# EAGLE board Thetis_RevF4_PCB (EAGLE 9.7.0)
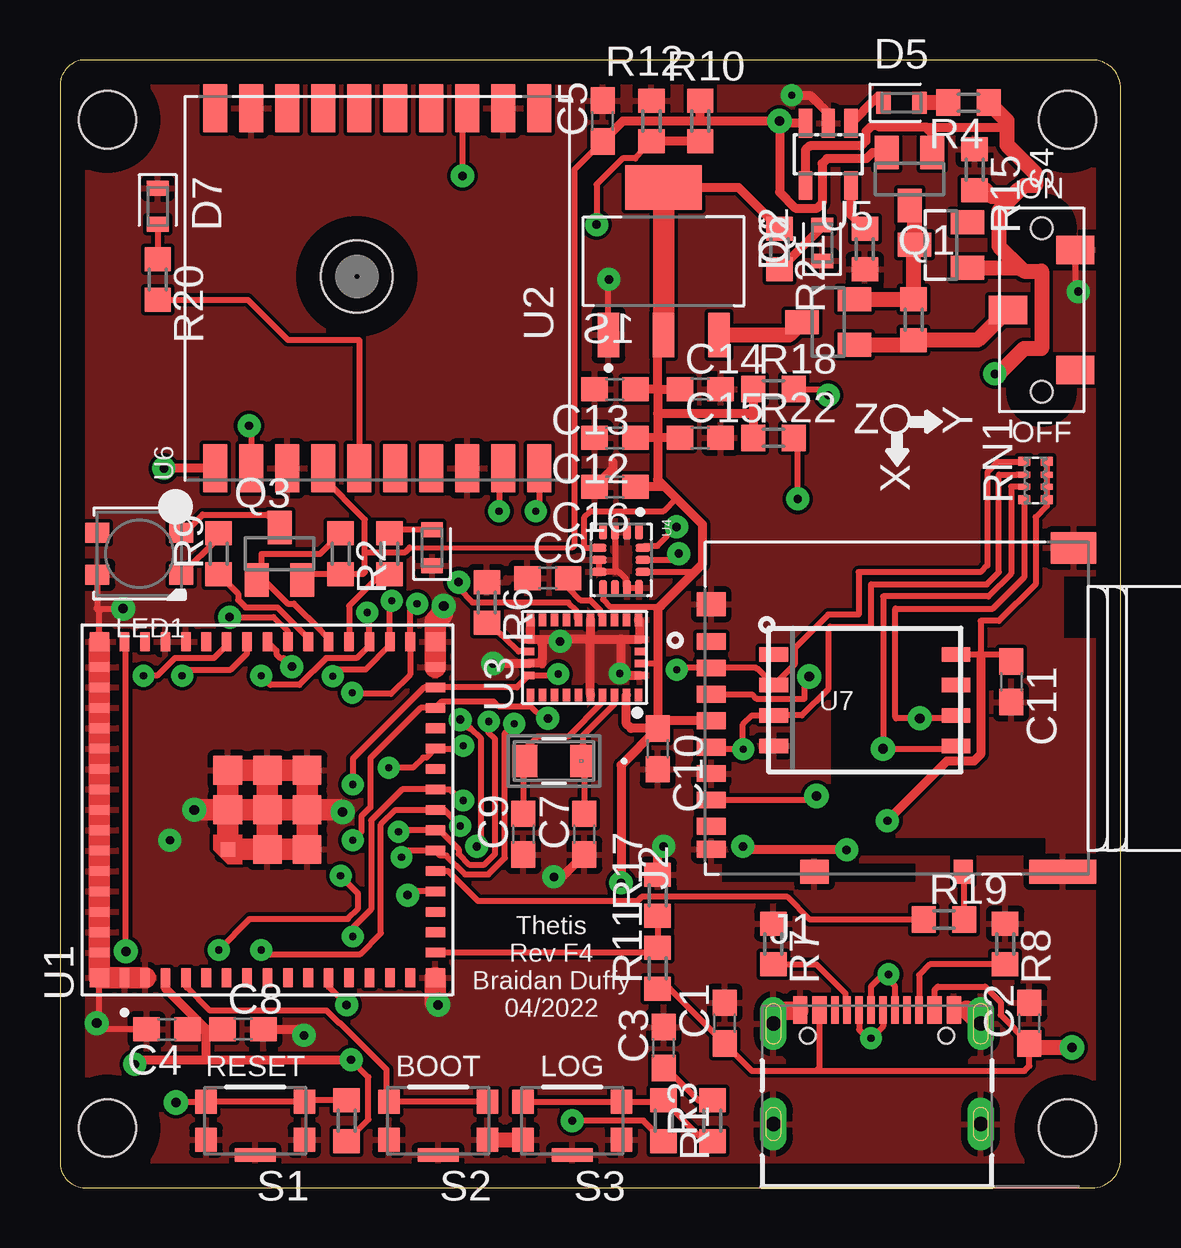
[diagram p0: board, top side]
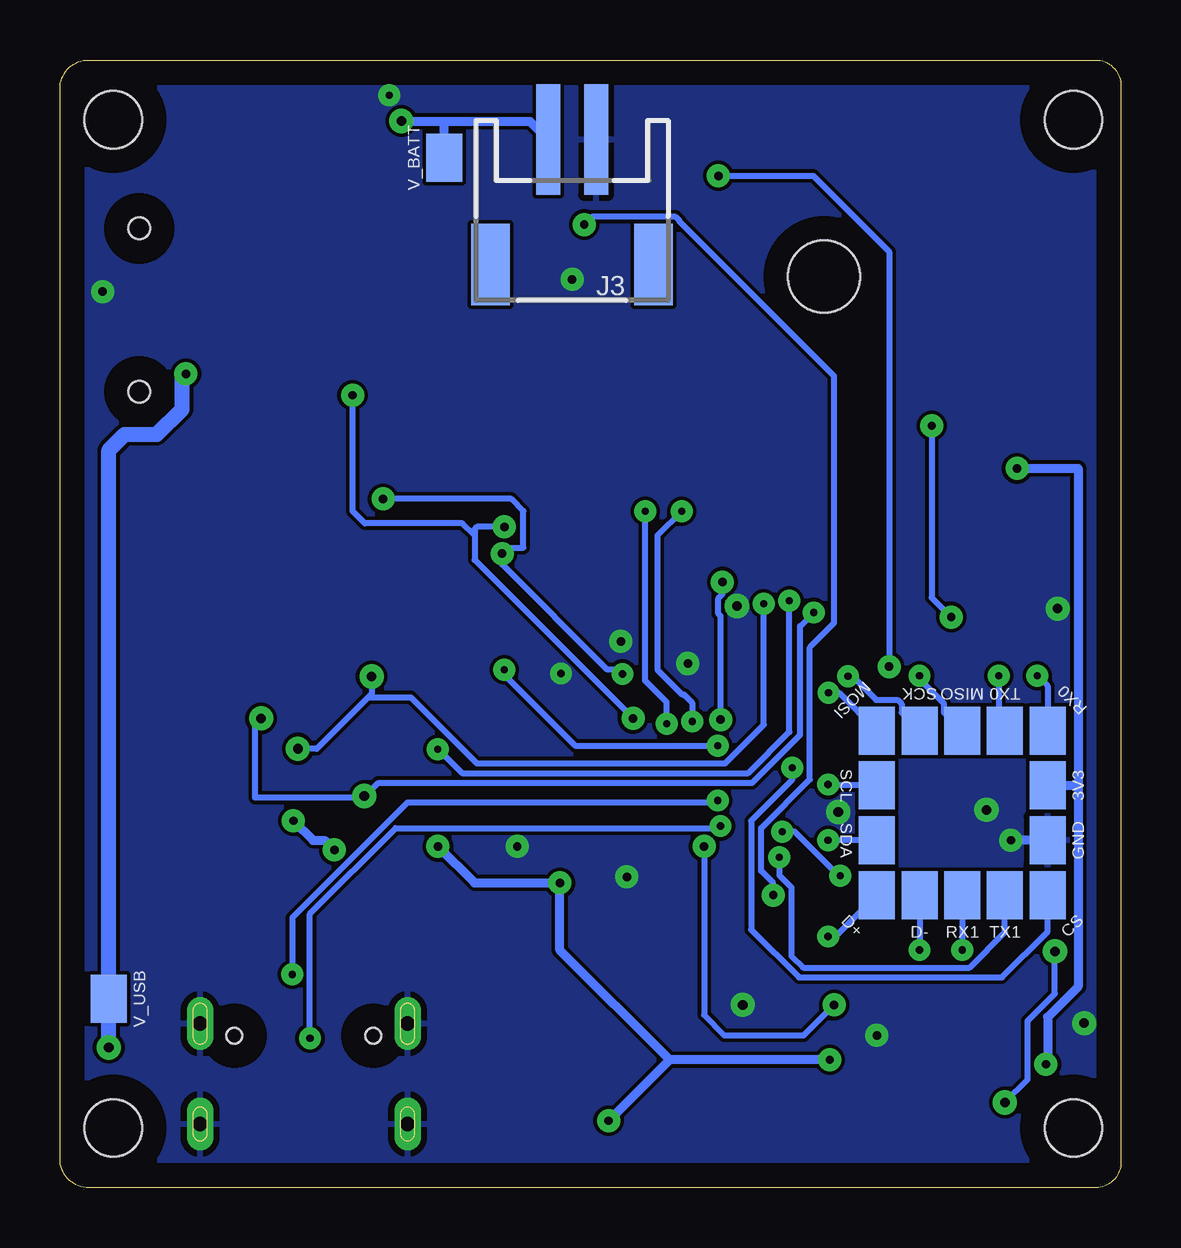
[diagram p1: board, bottom side, seen from below]

Size 44.2 x 46.99 mm. Coordinates in mm from the lower left corner, seen from the top.
Outline: 44.2,1.19 44.2,45.8 arc90 43.01,46.99 0.95,46.99 arc90 0.01,45.8 0.01,1.19 arc90 0.95,0 43.01,0 arc90 44.2,1.19
Copper layers (1*16): Top 0.035mm / dielectric 1.5mm / Bottom 0.035mm
Design rules "default *": minimum track width 6mil, minimum drill 0.3mm, track to track 6mil, track to pad 6mil, pad to pad 6mil, via to via 6mil, smd to smd 6mil, copper to edge 40mil, drill to drill 6mil, minimum pad ring 10mil, minimum via ring 12mil, stop-mask expansion 4mil, vias tented up to drill 0mil, thermal gap 10mil
Net classes: 0 default: width 0.178 mm; 1 highpower: width 0.305 mm, drill 0.483 mm; 2 lowpower: width 0.305 mm, drill 0.483 mm
Holes 2.39 mm at 1.98,2.49 1.98,44.5 41.98,44.5 41.98,2.49
tKeepout: area -0.4,42.1 to 4.4,46.9; area 39.6,42.1 to 44.4,46.9; area 39.6,0.1 to 44.4,4.9; area -0.4,0.1 to 4.4,4.9
bKeepout: area 39.6,42.1 to 44.4,46.9; area -0.4,42.1 to 4.4,46.9; area 39.6,0.1 to 44.4,4.9; area -0.4,0.1 to 4.4,4.9

## Footprints (pad centres in the part's own frame; a part is rotated, then mirrored left to right if it is on the bottom)
C0603 = smd 1.1 x 1: 1 -0.85,0; 2 0.85,0
SOT23 = smd 1 x 1.4: 1 -0.95,-1.1; 2 0.95,-1.1; 3 0,1.1
LEDC1608X65N = smd 0.612 x 0.912: A 0.75,0; C -0.75,0
LEDC1608X35N = smd 0.612 x 0.912: A 0.75,0; C -0.75,0
GCT_USB4105-GF-A = smd 0.6 x 1.15: A1_B12 -3.2,4.755; A4_B9 -2.4,4.755; B1_A12 3.2,4.755; B4_A9 2.4,4.755 | smd 0.3 x 1.15: A5 -1.25,4.755; A6 -0.25,4.755; A7 0.25,4.755; A8 1.25,4.755; B5 1.75,4.755; B6 0.75,4.755; B7 -0.75,4.755; B8 -1.75,4.755 | drill 0.6 pad 1.05 long: S1 -4.32,4.18; S4 4.32,4.18 | drill 0.6 pad 1 long: S2 -4.32,0; S3 4.32,0 | hole 0.65: 2.89,3.68; -2.89,3.68
HRS_DM3AT-SF-PEJM5 = smd 0.7 x 1.2: 1 3.2,0; 2 2.1,0; 3 1,0; 4 -0.1,0; 5 -1.2,0; 6 -2.3,0; 7 -3.4,0; 8 -4.5,0; SWB -5.45,0 | smd 1 x 1.2: P1 -6.4,-4.3; P4 4.75,0 | smd 1 x 2.8: P2 -6.4,-14.65 | smd 1.3 x 1.9: P3 7.1,-15.1 | smd 1 x 0.8: SWA -6.4,-10.5
JSTPH2 = smd 1 x 4.6: 1 -1,-3.7; 2 1,-3.7 | smd 1.6 x 3.4: NC1 -3.4,1.5; NC2 3.4,1.5
LED3535 = smd 1 x 0.85: 1 -1.75,0.875; 2 -1.75,-0.875; 3 1.75,-0.875; 4 1.75,0.875
R0603 = smd 1 x 1.1: 1 -0.85,0; 2 0.85,0
EXBN8V = smd 0.38 x 0.5: 1 -0.8,-0.475; 4 0.8,-0.475; 5 0.8,0.475; 8 -0.8,0.475 | smd 0.25 x 0.5: 2 -0.25,-0.475; 3 0.25,-0.475; 6 0.25,0.475; 7 -0.25,0.475
SW_KMR221GLFS = smd 0.9 x 1: 1 -2.05,0.8; 2 -2.05,-0.8; 3 2.05,-0.8; 4 2.05,0.8 | smd 1.7 x 0.55: 5 0,1.425
CL-SB-12A = smd 1.2 x 1.6: 1 -2.5,-1.4; 2 0,1.4; 3 2.5,-1.4 | hole 0.9: -3.4,0; 3.4,0
PAD-1.5X2.0 = smd 1.5 x 2: P$1 0,0
XCVR_ESP32-S2-MINI-1U = smd 0.8 x 0.4: 1 -7,5.95; 2 -7,5.1; 3 -7,4.25; 4 -7,3.4; 5 -7,2.55; 6 -7,1.7; 7 -7,0.85; 8 -7,0; 9 -7,-0.85; 10 -7,-1.7; 11 -7,-2.55; 12 -7,-3.4; 13 -7,-4.25; 14 -7,-5.1; 15 -7,-5.95; 31 7,-5.95; 32 7,-5.1; 33 7,-4.25; 34 7,-3.4; 35 7,-2.55; 36 7,-1.7; 37 7,-0.85; 38 7,0; 39 7,0.85; 40 7,1.7; 41 7,2.55; 42 7,3.4; 43 7,4.25; 44 7,5.1; 45 7,5.95 | smd 0.4 x 0.8: 16 -5.95,-7; 17 -5.1,-7; 18 -4.25,-7; 19 -3.4,-7; 20 -2.55,-7; 21 -1.7,-7; 22 -0.85,-7; 23 0,-7; 24 0.85,-7; 25 1.7,-7; 26 2.55,-7; 27 3.4,-7; 28 4.25,-7; 29 5.1,-7; 30 5.95,-7; 46 5.95,7; 47 5.1,7; 48 4.25,7; 49 3.4,7; 50 2.55,7; 51 1.7,7; 52 0.85,7; 53 0,7; 54 -0.85,7; 55 -1.7,7; 56 -2.55,7; 57 -3.4,7; 58 -4.25,7; 59 -5.1,7; 60 -5.95,7 | smd 1.2 x 1.2: 61_0 0,0; 61_1 -1.65,0; 61_2 -1.65,-1.65; 61_3 0,-1.65; 61_4 1.65,-1.65; 61_5 1.65,0; 61_6 1.65,1.65; 61_7 0,1.65 | smd 0.6 x 0.6: 61_8 -1.65,1.65 | smd 0.8 x 0.8: 62 -7,7; 63 -7,-7; 64 7,-7; 65 7,7
SOT230P700X180-4N = smd 1.86 x 0.9: 1 -3.075,2.3; 2 -3.075,0; 3 -3.075,-2.3 | smd 1.86 x 3.19: 4 3.075,0
LGA28R50P4X10_380X520X100 = smd 0.3 x 0.525: 1 -2.25,1.562; 6 -2.25,-1.562; 7 -1.75,-1.562; 8 -1.25,-1.562; 9 -0.75,-1.562; 10 -0.25,-1.562; 11 0.25,-1.562; 12 0.75,-1.562; 13 1.25,-1.562; 14 1.75,-1.562; 15 2.25,-1.562; 20 2.25,1.562; 21 1.75,1.562; 22 1.25,1.562; 23 0.75,1.562; 24 0.25,1.562; 25 -0.25,1.562; 26 -0.75,1.562; 27 -1.25,1.562; 28 -1.75,1.562 | smd 0.425 x 0.3: 2 -2.312,0.75; 3 -2.312,0.25; 4 -2.312,-0.25; 5 -2.312,-0.75; 16 2.312,-0.75; 17 2.312,-0.25; 18 2.312,0.25; 19 2.312,0.75
PQFN50P300X250X97-14N = smd 0.61 x 0.35: 1 -1.16,0.75; 2 -1.16,0.25; 3 -1.16,-0.25; 4 -1.16,-0.75; 8 1.16,-0.75; 9 1.16,-0.25; 10 1.16,0.25; 11 1.16,0.75 | smd 0.35 x 0.61: 5 -0.5,-0.91; 6 0,-0.91; 7 0.5,-0.91; 12 0.5,0.91; 13 0,0.91; 14 -0.5,0.91
SOT23-5L = smd 0.55 x 1.2: 1 -0.95,-1.3; 2 0,-1.3; 3 0.95,-1.3; 4 0.95,1.3; 5 -0.95,1.3
FGPMMOPA6H = smd 2 x 1: P$1 -7.5,6.75; P$2 -7.5,5.25; P$3 -7.5,3.75; P$4 -7.5,2.25; P$5 -7.5,0.75; P$6 -7.5,-0.75; P$7 -7.5,-2.25; P$8 -7.5,-3.75; P$9 -7.5,-5.25; P$10 -7.5,-6.75; P$11 7.5,-6.75; P$12 7.5,-5.25; P$13 7.5,-3.75; P$14 7.5,-2.25; P$15 7.5,-0.75; P$16 7.5,0.75; P$17 7.5,2.25; P$18 7.5,3.75; P$19 7.5,5.25; P$20 7.5,6.75 | hole 3: 0.5,0.85
LGA8_8X6 = smd 1.2 x 0.6: 1 -3.8,1.905; 2 -3.8,0.635; 3 -3.8,-0.635; 4 -3.8,-1.905; 5 3.8,-1.905; 6 3.8,-0.635; 7 3.8,0.635; 8 3.8,1.905
RT3215_RAL-L = smd 1.041 x 1.346: 1 -1.206,0; 2 1.206,0

## Placement (x,y rotation side)
C1  10 uF  [C0603]  27.69,6.86 90 top
C2  10 uF  [C0603]  40.39,6.86 90 top
C3  1 uF  [C0603]  25.15,5.84 90 top
C4  0.1 uF  [C0603]  4.46,6.6 180 top
C5  10 uF  [C0603]  22.61,44.45 90 top
C6  1 uF  [C0603]  20.33,25.4 0 top
C7  12.5 pF  [C0603]  21.85,14.73 90 top
C8  0.1 uF  [C0603]  7.63,6.6 0 top
C9  12.5 pF  [C0603]  19.31,14.73 90 top
C10  1 uF  [C0603]  24.9,18.29 270 top
C11  1 uF  [C0603]  39.63,21.08 270 top
C12  1 uF  [C0603]  23.12,31.24 180 top
C13  1 uF  [C0603]  23.12,33.27 180 top
C14  1 uF  [C0603]  26.68,33.27 0 top
C15  1 uF  [C0603]  26.68,31.24 0 top
C16  0.1 uF  [C0603]  23.12,29.21 180 top
D4  BAT400  [SOT23]  36.71,39.28 90 top
D5  ORG  [LEDC1608X65N]  35.06,45.21 0 top
D6  RED  [LEDC1608X65N]  31.76,39.37 90 top
D7  RED  [LEDC1608X35N]  4.07,40.89 270 top
D8  BLU  [LEDC1608X65N]  15.5,26.67 90 top
J1  USB4105-GF-A  [GCT_USB4105-GF-A]  34.04,2.66 0 top
J2  DM3AT-SF-PEJM5  [HRS_DM3AT-SF-PEJM5]  27.14,19.56 90 top
J3  [JSTPH2]  22.87,39.97 180 bottom
LED1  WS2812B3535  [LED3535]  3.31,26.42 180 top
Q1  AOSS21311C  [SOT23]  35.4,42.03 180 top
Q2  AOSS21311C  [SOT23]  32.01,36.07 90 top
Q3  AOSS21311C  [SOT23]  9.15,26.42 0 top
R1  10k  [R0603]  25.15,2.79 270 top
R2  1k  [R0603]  11.69,26.42 270 top
R3  10k  [R0603]  27.19,2.79 90 top
R4  1k  [R0603]  37.85,45.21 180 top
R5  2k  [R0603]  33.54,39.12 270 top
R6  10k  [R0603]  17.79,24.38 270 top
R7  5k1  [R0603]  29.73,10.16 270 top
R8  5k1  [R0603]  39.38,10.16 270 top
R9  480  [R0603]  6.61,26.42 90 top
R10  1M  [R0603]  26.68,44.45 90 top
R11  100k  [R0603]  24.9,9.14 90 top
R12  1M  [R0603]  24.65,44.45 270 top
R13  10k  [R0603]  11.95,2.79 270 top
R14  1k  [R0603]  13.72,26.42 90 top
R15  100k  [R0603]  38.11,42.42 270 top
R16  100k  [R0603]  35.57,36.16 90 top
R17  200k  [R0603]  24.9,12.19 90 top
R18  2.7k  [R0603]  29.73,33.27 0 top
R19  10k  [R0603]  36.84,11.18 0 top
R20  1k  [R0603]  4.07,37.85 270 top
R21  1k  [R0603]  29.98,39.12 270 top
R22  2.7k  [R0603]  29.73,31.24 0 top
RN1  10k  [EXBN8V]  40.65,29.46 90 top
S1  KMR221GLFS  [SW_KMR221GLFS]  8.14,2.79 180 top
S2  KMR221GLFS  [SW_KMR221GLFS]  15.76,2.79 180 top
S3  KMR221GLFS  [SW_KMR221GLFS]  21.34,2.79 180 top
S4  CL-SB-12X  [CL-SB-12A]  40.9,36.58 90 top
TP1  [PAD-1.5X2.0]  4.83,12.19 180 bottom
TP2  [PAD-1.5X2.0]  6.61,12.19 180 bottom
TP3  [PAD-1.5X2.0]  4.83,19.05 0 bottom
TP4  [PAD-1.5X2.0]  3.06,19.05 0 bottom
TP5  [PAD-1.5X2.0]  8.39,12.19 180 bottom
TP6  [PAD-1.5X2.0]  10.17,12.19 180 bottom
TP7  [PAD-1.5X2.0]  10.17,14.48 180 bottom
TP8  [PAD-1.5X2.0]  10.17,16.76 180 bottom
TP9  [PAD-1.5X2.0]  10.17,19.05 180 bottom
TP10  [PAD-1.5X2.0]  8.39,19.05 0 bottom
TP11  [PAD-1.5X2.0]  6.61,19.05 0 bottom
TP12  [PAD-1.5X2.0]  3.06,12.19 0 bottom
TP13  [PAD-1.5X2.0]  28.2,42.93 0 bottom
TP14  [PAD-1.5X2.0]  3.06,14.48 180 bottom
TP15  [PAD-1.5X2.0]  3.06,16.76 180 bottom
TP16  [PAD-1.5X2.0]  42.17,7.87 0 bottom
U1  ESP32-S2-MINI-1U  [XCVR_ESP32-S2-MINI-1U]  8.64,15.75 90 top
U2  AZ1117H-3.3TRE1  [SOT230P700X180-4N]  25.15,38.61 90 top
U3  BNO055  [LGA28R50P4X10_380X520X100]  21.85,22.1 180 top
U4  LSM6DSO32TR  [PQFN50P300X250X97-14N]  23.38,26.16 270 top
U5  MCP73831/OT  [SOT23-5L]  32.01,43.06 180 top
U6  [FGPMMOPA6H]  13.22,37.47 90 top
U7  XTSD  [LGA8_8X6]  33.54,20.32 0 top
X1  32.768 kHz  [RT3215_RAL-L]  20.58,17.78 180 top

## Library data of the parts
C1-C16 = rcl; SPICEPREFIX: C
D4 = diode
D5 D6 D8 = LED; CATEGORY: LED; COLOR: GREEN; DESCRIPTION: CHIP LED ROUND; SUB-CATEGORY: CHIP; TYPE: ROUND_TOP
D7 = LED; CATEGORY: LED; COLOR: YELLOW; DESCRIPTION: CHIP LED FLAT; SUB-CATEGORY: CHIP; TYPE: FLAT_TOP
J1 = USB4105-GF-A; AVAILABILITY: In Stock; DESCRIPTION: USB-C (USB TYPE-C) USB 2.0 Receptacle Connector 24 (16+8 Dummy) Position Surface Mount, Right Angle; Through Hole; MF: GCT; MP: USB4105-GF-A; PACKAGE: None; PRICE: None; PURCHASE-URL: https://pricing.snapeda.com/search/part/USB4105-GF-A/?ref=eda
J2 = DM3AT-SF-PEJM5; AVAILABILITY: Unavailable; DESCRIPTION: DM3 RA SMT microSD memory card push/push; MF: Hirose; MP: DM3AT-SF-PEJM5; PACKAGE: None; PRICE: None
J3 = UTL-Lib
LED1 = adafruit
Q1-Q3 = Transistor; CATEGORY: Transistor; DESCRIPTION: MOSFET P-CH 50V 130MA SOT-23; DRAIN_CURRENT: 130mA; MANUFACTURER: ON Semiconductor; MPN: BSS84; OPERATING_TEMP: -55°C ~ 150°C; PART_STATUS: Active; ROHS_COMPLIANT: Yes; SUB-CATEGORY: MOSFET; THERMALLOSS: 360mW; TYPE: P-Channel
R1-R22 = rcl; SPICEPREFIX: R
RN1 = resistor-dil-Poseidon-Edit; OC_FARNELL: unknown; OC_NEWARK: unknown
S1-S3 = KMR221GLFS; MANUFACTURER: CnK
S4 = switches; DIGIKEY: 563-1314-1-ND
TP1-TP16 U7 = microbuilder
U1 = UTL-Lib; MANUFACTURER: Espressif Systems; MAXIMUM_PACKAGE_HEIGHT: 2.55mm; PARTREV: 1.0; STANDARD: Manufacturer Recommendations
U2 = AZ1117EH-5.0TRG1; ARROW_ELECTRONICS-PURCHASE-URL: https://snapeda.com/shop?store=Arrow+Electronics&id=482930; AVAILABILITY: Good; DESCRIPTION: Linear Voltage Regulator IC 1 Output 1A SOT-223; DIGIKEY-PURCHASE-URL: https://snapeda.com/shop?store=DigiKey&id=482930; MF: Diodes Inc.; MOUSER-PURCHASE-URL: https://snapeda.com/shop?store=Mouser&id=482930; MP: AZ1117EH-5.0TRG1; PACKAGE: SOT-223 Diodes Inc.; PRICE: None
U3 = UTL-Lib; MANUFACTURER: BOSCH
U4 = UTL-Lib; MANUFACTURER: TDK Corporation; PARTREV: 0.4; STANDARD: IPC 7351B
U5 U6 = adafruit - EVE Edit
X1 = UTL-Lib; COPYRIGHT: Copyright (C) 2022 Ultra Librarian. All rights reserved.; DIGI-KEY_PART_NUMBER_1: 2151-RT3215-32.768-12.5-TR-ND; DIGI-KEY_PART_NUMBER_2: 2151-RT3215-32.768-12.5-TRCT-ND; DIGI-KEY_PART_NUMBER_3: 2151-RT3215-32.768-12.5-TRDKR-ND; MANUFACTURER_PART_NUMBER: RT3215-32.768-12.5-TR; MFR_NAME: Raltron

## Nets
3.3V: C4.1 C8.1 C10.1 C11.1 C12.1 C13.1 C14.1 C15.1 C16.1 J2.4 R1.2 R13.2 R18.1 R21.1 R22.1 RN1.1 RN1.2 RN1.3 RN1.4 TP15.P$1 U1.3 U2.2 U2.4 U3.3 U3.28 U4.5 U4.8 U4.12 U6.P$1 U7.8
!GPS_RST: U1.37 U6.P$2
!IMU_RST: U1.11 U3.11
!LOG_EN: C3.1 R3.2
!NEO_EN: Q3.1 R2.1 U1.35
!RST: R13.1 S1.2 S1.3 U1.45
ACT_LED: R14.1 U1.34
BATT_MON: R10.1 R12.2 U1.19
BOOT: S2.2 S2.3 U1.4
CC1: J1.A5 R7.2
CC2: J1.B5 R8.2
ESP_RX0: TP4.P$1 U1.40
ESP_RX1: TP2.P$1 U1.22 U6.P$9
ESP_TX0: TP3.P$1 U1.39
ESP_TX1: TP1.P$1 U1.21 U6.P$10
GND: C1.2 C2.2 C3.2 C4.2 C5.2 C6.1 C7.1 C8.2 C9.1 C10.2 C11.2 C12.2 C13.2 C14.2 C15.2 C16.2 D6.C D7.C D8.C J1.A1_B12 J1.B1_A12 J1.S1 J1.S2 J1.S3 J1.S4 J2.6 J2.P1 J2.P2 J2.P3 J2.P4 J2.SWB J3.1 LED1.4 R5.2 R6.1 R7.1 R8.1 R12.1 R15.1 R17.2 S1.1 S1.4 S1.5 S2.1 S2.4 S2.5 S3.1 S3.4 S3.5 S4.3 TP14.P$1 U1.1 U1.2 U1.30 U1.42 U1.43 U1.46 U1.47 U1.48 U1.49 U1.50 U1.51 U1.52 U1.53 U1.54 U1.55 U1.56 U1.57 U1.58 U1.59 U1.60 U1.61_0 U1.61_1 U1.61_2 U1.61_3 U1.61_4 U1.61_5 U1.61_6 U1.61_7 U1.61_8 U1.62 U1.63 U1.64 U1.65 U2.1 U3.2 U3.5 U3.6 U3.10 U3.15 U3.16 U3.18 U3.25 U4.2 U4.3 U4.6 U4.7 U4.10 U4.11 U5.2 U6.P$3 U6.P$8 U6.P$12 U6.P$19 U7.4
GPS_FIX: R20.2 U6.P$5
GPS_PPS: U1.38 U6.P$13
MISO: J2.7 RN1.8 TP11.P$1 U1.33 U7.6
MOSI: J2.3 RN1.7 TP9.P$1 U1.31 U7.5
N$1: Q2.1 R16.1 S4.2
N$2: D7.A R20.1
N$3: D8.A R14.2
N$4: R1.1 R3.1 S3.2 S3.3
N$5: LED1.2 Q3.3
N$6: Q2.3 U2.3
N$7: R6.2 U3.17
N$8: LED1.1 R9.2
N$9: C6.2 U3.9
N$13: D4.3 Q1.3 Q2.2 R16.2
N$20: D5.A R4.2
N$21: D5.C U5.1
N$22: R5.1 U5.5
N$23: J2.SWA R19.2
N$24: D6.A R21.2
NEO_DATA: R9.1 U1.36
SCK: J2.5 RN1.6 TP10.P$1 U1.32 U7.3
SCL: R22.2 TP8.P$1 U1.29 U3.19 U4.13
SD_CD: R19.1 U1.20
SD_CS: J2.2 RN1.5 TP12.P$1 U1.26 U7.2
SDA: R18.2 TP7.P$1 U1.28 U3.20 U4.14
USB_DN: J1.A7 J1.B7 TP5.P$1 U1.23
USB_DP: J1.A6 J1.B6 TP6.P$1 U1.24
USB_MON: R11.2 R17.1 U1.16
V_BATT: C5.1 J3.2 Q1.2 Q3.2 R2.2 R10.2 TP13.P$1 U5.3 U6.P$4
V_USB: C1.1 C2.1 D4.1 J1.A4_B9 J1.B4_A9 Q1.1 R4.1 R11.1 R15.2 TP16.P$1 U5.4
XIN32: C7.2 U3.27 X1.1
XOUT32: C9.2 U3.26 X1.2

## Tracks (layer width: path | path; a pad name or v marks a point on that pad's centre or on a via)
3.3V  (via drill 0.35)
  Top 0.254: C10.1 25.11,19.35 | R13.2 12.85,2.85 12.85,4.61 v12.13,5.33 | U7.8 38.36,22.23 | 38.36,22.23 39.34,22.23 C11.1 | 38.36,22.23 38.36,23.62 39.12,23.62 40.65,25.15 40.65,27.94 41.12,28.41 RN1.1 RN1.2 RN1.3 RN1.4 | R1.2 24.3,2.79 v21.34,2.79 | U4.12 26.42,25.66 26.43,25.65 | U4.8 22.63,24.52 22.94,24.21 22.94,24.2 24.99,24.2 25.03,24.25 | 25.68,28.72 25.15,28.19 22.11,28.19 21.85,27.94 21.85,26.67 21.86,26.66 U4.5 | U3.3 24.9,21.85
  Top 0.381: U2.4 28.26,41.68 R21.1 | U2.2 24.9,35.28 24.9,33.27 | 24.9,33.27 24.9,32.26 | 24.9,32.26 24.9,31.24 | U6.P$1 v4.33,29.97 | v3.12,5.15 3.31,5.33 6.1,5.33 | 6.1,5.33 6.1,6.6 | C4.1 6.1,6.6 | 6.1,6.6 C8.1 | 6.1,6.6 4.39,8.31 U1.3 | 6.1,5.33 v12.13,5.33 | C10.1 23.38,17.61 v23.38,12.7 | C10.1 23.8,19.14 23.6,19.33 U3.28 | 24.9,21.84 C10.1 | 24.9,21.85 24.9,21.84 | J2.4 25.22,19.46 25.11,19.35 | v34.48,15.29 36.96,17.77 38.08,17.77 38.36,18.06 38.36,22.23 | v32.77,14.07 28.6,14.07 v28.46,14.22 | 24.9,33.27 C13.1 | 24.9,33.27 C14.1 | 24.9,31.24 C12.1 | C15.1 24.9,31.24 | 24.9,31.24 24.9,29.5 25.17,29.23 | 25.17,29.23 25.68,28.72 26.76,27.64 26.76,25.98 26.43,25.65 25.03,24.25 24.9,24.11 24.9,21.84 | R18.1 28.88,32.26 | 28.88,32.26 R22.1 | 28.88,32.26 24.9,32.26 | C16.1 23.99,29.23 25.17,29.23
  Top 0.889: U2.2 U2.4
  Bottom 0.381: v4.33,29.97 1.79,29.97 1.79,16.76 | 1.79,16.76 1.79,8.38 3.06,7.11 3.06,5.21 v3.12,5.15 | TP15.P$1 1.79,16.76 | v12.13,5.33 18.8,5.33 | v21.34,2.79 18.8,5.33 | 18.8,5.33 23.38,9.91 v23.38,12.7 26.93,12.7 v28.46,14.22 | v34.48,15.29 33.66,14.48 33.18,14.48 v32.77,14.07
!GPS_RST  (via drill 0.35)
  Top 0.254: U6.P$2 7.97,31.67 v7.88,31.75 | v7.07,23.78 8.89,23.78 9.49,23.18 U1.37
  Bottom 0.254: v7.88,31.75 7.88,24.59 v7.07,23.78
!IMU_RST  (via drill 0.35)
  Top 0.254: U3.11 21.53,23.73 21.53,24.04 21.19,24.38 17.19,24.38 16.61,24.97 v16.61,25.23 | v17.37,14.22 17.53,14.39 17.53,18.72 17.1,19.15 17.03,19.15 v16.68,19.5 | v11.95,7.62 11.19,8.37 U1.11
  Bottom 0.254: v17.37,14.22 17.37,7.2 16.52,6.35 13.22,6.35 v11.95,7.62 | v16.68,19.5 16.68,23.82 16.78,23.91 16.78,24.57 16.61,24.73 v16.61,25.23
!LOG_EN
  Top 0.254: R3.2 26.6,3.64 25.36,4.88 C3.1
!NEO_EN
  Top 0.254: R2.1 10.84,26.42 8.39,26.42 8.39,25.5 Q3.1 8.51,25.32 9.49,24.34 9.75,24.34 10.86,23.23 11.19,22.86 U1.35
!RST  (via drill 0.4 pad 0.51)
  Top 0.254: R13.1 10.24,3.64 S1.2 S1.3 4.87,3.59 v4.83,3.56 | U1.45 2.68,22.73 2.75,22.66 v2.75,9.85
  Bottom 0.254: v2.75,9.85 2.75,8.09 3.88,6.95 3.88,4.51 v4.83,3.56
ACT_LED
  Top 0.254: R14.1 13.36,25.57 12.04,24.25 U1.34
BATT_MON  (via drill 0.35)
  Top 0.254: R12.2 23.97,42.89 23.44,42.89 22.36,41.81 v22.36,40.13 | U1.19 14.64,12.35 v14.49,12.19
  Top 0.381: R10.1 R12.2
  Bottom 0.254: v14.49,12.19 14.49,12.7 14.99,13.21 14.99,14.99 12.96,17.02 12.96,22.52 11.95,23.54 11.95,33.82 18.39,40.26 18.39,40.29 18.55,40.45 22.04,40.45 v22.36,40.13
BOOT
  Top 0.254: S2.2 S2.3 13.61,3.69 13.61,4.93 11.68,6.86 11.63,6.86 11.11,7.38 6.24,7.38 5.28,8.35 U1.4
CC1
  Top 0.254: J1.A5 32.72,7.48 32.72,8.1 31.52,9.31 R7.2
CC2
  Top 0.254: R8.2 36.24,9.31 35.79,8.86 J1.B5
ESP_RX0  (via drill 0.3 pad 0.51)
  Top 0.254: U1.40 6.94,22.6 6.41,22.07 4.78,22.07 4.05,21.34 v3.48,21.34
  Bottom 0.254: v3.48,21.34 3.06,20.91 TP4.P$1
ESP_RX1  (via drill 0.3 pad 0.51)
  Top 0.254: U6.P$9 18.3,29.8 v18.3,28.19 | v6.61,9.91 7.91,11.2 12,11.2 12.43,11.63 12.43,12.24 11.69,12.98 v11.69,13 | v17.86,19.43 17.86,18.97 18.13,18.7 18.13,13.91 17.68,13.46 17.05,13.46 16.61,13.91 16.61,14.11 15.82,14.9 U1.22 14.17,14.9 v14.11,14.83
  Bottom 0.254: TP2.P$1 v6.61,9.91 | v18.3,28.19 19.31,27.18 19.31,21.59 18.27,20.55 18.2,20.55 17.86,20.21 v17.86,19.43 | v11.69,13 11.76,13 13.59,14.83 v14.11,14.83
ESP_TX0  (via drill 0.3 pad 0.51)
  Top 0.254: U1.39 7.79,22.26 7.12,21.59 5.34,21.59 v5.09,21.33
  Bottom 0.254: TP3.P$1 5.09,19.3 v5.09,21.33
ESP_TX1  (via drill 0.3 pad 0.51)
  Top 0.254: U6.P$10 19.97,28.34 v19.82,28.19 | v18.92,19.33 18.53,18.94 18.53,13.74 17.85,13.06 16.88,13.06 16.1,13.84 15.85,13.84 U1.21 14.51,14.05 v14.23,13.77
  Bottom 0.254: v19.82,28.19 19.82,21.13 18.92,20.23 v18.92,19.33 | TP1.P$1 4.83,10.65 6.31,9.17 13.24,9.17 13.73,9.65 13.73,12.52 14.23,13.02 v14.23,13.77
GND  (via drill 0.3, 0.35, 0.4 pad 0.51)
  Top 0.254: U1.65 1.64,24.02 1.53,24.13 | LED1.4 1.56,24.16 1.53,24.13 | U1.62 1.64,6.97 v1.53,6.86 1.79,6.6 C4.2 | 1.53,24.13 v2.63,24.13 | U4.11 U4.10 23.58,25.05 23.58,25.37 23.29,25.66 23.12,25.66 | 23.12,25.66 U4.7 U4.6 | U4.3 23.13,25.67 23.12,25.66 | S4.3 42.3,37.46 v42.43,37.34 | U2.1 22.85,37.83 v22.87,37.85 | J1.B1_A12 37.79,7.41
  Top 0.381: U3.6 24.16,23.6 U3.5 24.15,22.86 23.38,22.86 | 24.15,21.34 23.38,21.34 | 23.38,21.34 23.38,22.86 | U3.10 22.11,22.86 | 22.11,22.86 23.38,22.86 | U3.25 22.1,22.86 22.11,22.86 | 22.11,22.86 20.93,22.86 20.92,22.85 | 20.92,22.85 v20.84,22.77 | 20.07,22.85 U3.16 19.6,22.91 U3.15 | 20.07,22.85 20.92,22.85 | 20.07,22.85 20.07,22.66 20.09,22.64 20.09,22.06 20.07,22.04 20.07,21.84 20.07,21.85 U3.18 v18.04,21.84 | 23.38,21.34 23.33,21.39 v23.33,21.43 | C8.2 9.91,6.6 v10.17,6.35 | v25.15,14.22 24.9,13.97 R17.2 | C7.1 20.92,12.95 v20.58,12.95 | C16.2 23.04,29.98 23.04,30.23 | v30.49,45.52 30.51,45.49 31.29,45.49 32.01,44.77 U5.2
  Top 0.635: S2.1 S3.4
  Top 0.762: 37.79,7.41 J1.S4 | 30.8,7.37 29.73,7.37
  Top 0.889: U1.65 U1.46 U1.47 U1.48 U1.49 U1.50 U1.51 U1.52 U1.53 U1.54 U1.55 U1.56 U1.57 U1.58 U1.59 U1.60 U1.62 U1.1 U1.2 | U1.61_5 U1.61_6 U1.61_7 | U1.61_5 U1.61_4 U1.61_3 | U1.61_3 U1.61_0 | U1.61_0 U1.61_7 | U1.61_7 U1.61_8 U1.61_1 | U1.61_1 U1.61_2 U1.61_3 | U1.61_0 U1.61_1 | U1.61_5 U1.61_0 | U1.61_7 v5.6,15.75 | U1.30 U1.64 15.64,23.61 15.93,23.9 15.93,24.18 v15.99,24.24 | U1.63 15.64,7.73 v15.76,7.62 | U1.61_3 11.68,15.75 v11.78,15.66
  Bottom 0.381: TP14.P$1 v4.58,14.48
  pour Top: -1.64,-1.14 46.62,-1.14 46.62,47.88 -1.64,47.88
  pour Bottom: -1.64,-1.14 46.62,-1.14 46.62,47.88 -1.64,47.88
GPS_FIX
  Top 0.254: R20.2 7.83,37 9.49,35.33 12.47,35.33 U6.P$5
GPS_PPS  (via drill 0.35)
  Top 0.254: U1.38 9.01,22.38 9.01,22.23 9.18,22.07 9.31,22.07 v9.66,21.72 | v16.77,42.16 16.77,44.78 16.86,44.87
  Top 0.635: U6.P$13 16.86,44.87
  Bottom 0.254: v16.77,42.16 12.82,42.16 9.66,39.01 v9.66,21.72
MISO  (via drill 0.3 pad 0.51, 0.4 pad 0.51)
  Top 0.254: U7.6 37.21,19.56 v35.82,19.56 34.84,19.56 34.81,19.6 34.81,24.13 38.87,24.13 40.17,25.43 RN1.8 | J2.7 31.36,16.16 v31.53,16.33 | v8.39,21.34 8.77,20.96 9.97,20.96 11.09,22.07 12.36,22.07 12.96,22.67 12.96,22.68 U1.33 12.89,23.88 v12.8,23.97
  Bottom 0.254: v35.82,19.56 36.08,19.3 36.08,16.26 31.5,16.26 31.5,16.31 | v31.53,16.33 31.5,16.31 | TP11.P$1 7.36,19.8 7.36,20.17 8.39,21.2 v8.39,21.34 | 31.5,16.31 30.94,16.87 15.37,16.87 13.37,18.87 13.37,23.41 v12.8,23.97
MOSI  (via drill 0.3 pad 0.51, 0.4 pad 0.51)
  Top 0.254: U7.5 37.21,18.29 v34.3,18.29 v34.29,18.29 34.29,24.63 34.3,24.64 38.69,24.64 39.63,25.59 39.63,29.21 RN1.7 | J2.3 28.84,20.56 29.02,20.38 31.03,20.38 31.03,21.11 v31.22,21.3 | v12.18,20.62 12.23,20.57 13.79,20.57 14.59,21.38 U1.31 14.59,24.05 v14.88,24.33
  Bottom 0.254: v34.29,18.29 33.51,18.29 31.36,20.43 | 31.36,20.43 29.59,20.43 26.84,17.68 16.49,17.68 14.88,19.3 v14.88,24.33 | TP9.P$1 11.74,20.62 v12.18,20.62 | v31.22,21.3 31.22,20.58 31.36,20.43
N$1
  Top 0.635: Q2.1 35.37,35.12 R16.1 38.24,35.31 S4.2
N$2
  Top 0.254: D7.A R20.1
N$3
  Top 0.254: R14.2 13.88,27.42 D8.A
N$4
  Top 0.254: R3.1 26.85,1.94 R1.1 25.1,3.59 S3.2 S3.3
N$5
  Top 0.254: LED1.2 5.19,27.29 5.95,28.05 8.62,28.05 Q3.3
N$6
  Top 0.635: U2.3 30.38,35.53 Q2.3
N$7
  Top 0.254: U3.17 19.11,22.35 18.51,22.95 R6.2
N$8
  Top 0.254: R9.2 6.61,27.09 LED1.1
N$9
  Top 0.254: U3.9 22.58,23.69 22.58,23.85 22.53,23.9 22.53,24.04 22.08,24.49 21.68,24.49 21.18,24.99 C6.2
N$13
  Top 0.635: Q1.3 35.61,40.72 D4.3 35.57,39.24 R16.2 Q2.2
N$20
  Top 0.635: R4.2 D5.A
N$21
  Top 0.381: 34.15,45.37 33.98,45.37 U5.1
  Top 0.635: D5.C 34.15,45.37
N$22
  Top 0.381: U5.5 32.96,40.54 R5.1
N$23
  Top 0.254: J2.SWA 37.69,13.11 R19.2
N$24
  Top 0.381: R21.2 31.76,40.04 D6.A
NEO_DATA
  Top 0.254: R9.1 7.42,24.75 7.42,24.5 7.74,24.19 9.06,24.19 10.34,22.9 U1.36
SCK  (via drill 0.3 pad 0.51)
  Top 0.254: J2.5 27.21,18.29 v28.46,18.29 | v28.46,18.29 28.46,19.3 28.84,19.68 U7.3 30.91,19.68 32,20.77 32,23.3 32.08,23.39 33.79,23.39 33.79,25.14 33.79,25.15 38.62,25.15 39.12,25.65 39.12,29.72 39.89,29.72 39.89,29.71 RN1.6 | v28.46,18.29 v28.47,18.28 | v11.37,21.31 11.37,21.52 11.44,21.59 12.73,21.59 13.74,22.6 U1.32 13.74,24.39 v13.82,24.46
  Bottom 0.254: v28.47,18.28 28.44,18.28 27.45,17.28 15.53,17.28 13.82,19 v13.82,24.46 | TP10.P$1 9.14,19.8 9.14,20.17 9.3,20.33 10.2,20.33 11.18,21.31 v11.37,21.31
SCL  (via drill 0.3 pad 0.51, 0.35)
  Top 0.254: v12.2,16.8 12.2,17.87 15.18,20.85 U1.29 19.04,20.85 U3.19 20.34,21.35 20.4,21.41 v20.76,21.41 | U4.13 25.52,26.16 v25.78,26.42 | v30.74,28.7 30.74,31.08 R22.2
  Bottom 0.254: v12.2,16.8 12.16,16.76 TP8.P$1 | v20.76,21.41 20.95,21.59 21.4,21.59 25.78,25.97 v25.78,26.42 25.53,26.67 24.9,26.67 24.9,28.19 25.41,28.7 v30.74,28.7
SD_CD
  Top 0.254: R19.1 31.25,11.18 30.3,12.12 24.23,12.12 24.05,11.94 17.43,11.94 16.17,13.2 U1.20
SD_CS  (via drill 0.3 pad 0.51)
  Top 0.254: v25.7,21.58 25.7,21.66 J2.2 29.01,21.66 29.02,21.65 29.04,21.65 U7.2 29.86,21.08 29.89,21.08 30.61,21.81 30.61,22.49 32,23.88 33.28,23.88 33.28,25.65 38.36,25.65 38.64,25.93 38.64,29.81 39.06,30.23 40.13,30.23 RN1.5 | v16.8,18.42 16.68,18.3 U1.26 15.27,17.93 15.13,17.93 14.7,17.5 v13.7,17.5
  Bottom 0.254: v25.7,21.58 25.7,21.37 22.74,18.42 v16.8,18.42 | v13.7,17.5 13.7,17 15.4,15.29 15.4,10.76 13.41,8.77 4.96,8.77 3.06,10.67 TP12.P$1
SDA  (via drill 0.3 pad 0.51, 0.35)
  Top 0.254: 19.6,20.07 U3.20 | v20.33,19.56 20.11,19.56 19.6,20.07 | U4.14 24.36,26.74 24.89,26.74 v25.69,27.53 | 19.6,20.07 18.26,20.07 18.07,20.27 15.91,20.27 U1.28 15.03,20 12.93,17.9 12.93,15.85 12.56,15.47 12.56,14.84 v12.2,14.48 | R18.2 31.76,33.27 v32.01,33.02
  Bottom 0.254: TP7.P$1 v12.2,14.48 | v25.69,27.53 26.83,27.53 26.93,27.43 26.93,27.18 | 26.93,27.18 26.93,26.16 v20.33,19.56 | 26.93,27.18 27.44,27.69 31.5,27.69 32.01,28.19 v32.01,33.02
USB_DN  (via drill 0.3 pad 0.51)
  Top 0.254: J1.B7 33.29,6.59 33.54,6.35 33.67,6.35 v33.79,6.23 34.29,6.73 J1.A7 | v8.39,9.91 8.56,9.73 12.5,9.73 13.37,10.61 13.37,15.14 13.98,15.75 U1.23 16.01,15.75 v16.68,15.07
  Bottom 0.254: TP5.P$1 v8.39,9.91 | v33.79,6.23 33.79,11.41 30.22,14.98 16.77,14.98 v16.68,15.07
USB_DP  (via drill 0.3 pad 0.51)
  Top 0.254: J1.B6 34.79,8.39 34.3,8.89 | J1.A6 33.79,8.39 34.3,8.89 | 34.3,8.89 v34.52,8.89 | v12.2,10.47 12.2,10.83 12.97,11.6 12.97,15.31 14.26,16.6 U1.24 16.25,16.6 16.71,16.14 v16.8,16.14
  Bottom 0.254: TP6.P$1 11.89,10.47 v12.2,10.47 | v34.52,8.89 34.52,11.25 29.73,16.05 16.89,16.05 v16.8,16.14
USB_MON
  Top 0.254: R17.1 R11.2 24.7,9.8 U1.16
V_BATT  (via drill 0.4 pad 0.51)
  Top 0.203: 14.57,26.67 21.34,26.67
  Top 0.254: Q3.2 10.35,25.57 R2.2 12.62,25.57 12.71,25.65 12.71,26.42 | U6.P$4 10.92,29.93 10.92,29.62 12.71,27.84 12.71,26.42 | 12.71,26.42 12.78,26.49 14.39,26.49 14.57,26.67 | 21.34,26.67 21.44,26.77 21.44,42.43 C5.1
  Top 0.381: 26.68,44.45 v29.98,44.45 | 26.68,44.45 R10.2 | C5.1 23.46,44.45 26.68,44.45 | U5.3 30.07,44.36 v29.98,44.45 | Q1.2 33.85,43.13 33.6,42.88 31.97,42.88 31.76,42.67 31.76,41.02 31.55,40.81 30.64,40.81 29.98,41.48 v29.98,44.45
  Bottom 0.381: 28.2,44.44 29.97,44.44 v29.98,44.45 | 28.2,44.44 24.63,44.44 J3.2 | TP13.P$1 28.2,44.44
V_USB  (via drill 0.35, 0.4 pad 0.51)
  Top 0.254: J1.B4_A9 36.44,8.24 36.58,8.38 38.55,8.38 39.2,7.74 39.2,7.21 C2.1 40.39,5.84 40.39,5.08 40.18,4.87 31.5,4.87 | 31.5,4.87 28.83,4.87 C1.1 25.41,8.29 R11.1 | J1.A4_B9 31.64,5.01 31.5,4.87
  Top 0.381: 36.08,44.2 36.35,43.92 Q1.1 | 36.08,44.2 39.45,44.2 | U5.4 31.06,43.25 31.23,43.41 33.38,43.41 33.58,43.62 33.58,44 33.83,44.25 34.08,44.25 34.14,44.2 36.08,44.2
  Top 0.635: R4.1 39.45,44.46 39.45,44.2 39.45,43.45 40.65,42.26 40.65,41.76 40.16,41.76 39.97,41.57 | 39.97,41.57 39.12,40.72 39.12,39.24 40.02,38.33 | v42.17,5.84 40.39,5.84 | D4.1 40.02,38.33 | 40.02,38.33 40.16,38.19 40.9,38.19 40.9,34.96 40.16,34.96 39.12,33.91 v38.96,33.91 | R15.2 38.58,41.57 38.84,41.31 39.65,41.31 39.91,41.57 39.97,41.57
  Bottom 0.635: v38.96,33.91 39.12,33.75 39.12,32.44 40.16,31.39 41.51,31.39 42.17,30.73 TP16.P$1 v42.17,5.84
XIN32
  Top 0.254: U3.27 23.1,20.15 21.79,18.84 X1.1 21.85,17.72 C7.2
XOUT32
  Top 0.254: U3.26 22.6,20.23 21.17,18.8 19.88,18.8 19.38,18.29 X1.2 19.31,17.72 C9.2

## Text on the board
tSilk: ON | 1S | Z | Y | OFF | X | Thetis / Rev F4 / Braidan Duffy / 04/2022 | RESET | BOOT | LOG
_bsilk: V_BATT | TX0 | MISO | SCK | RX0 | MOSI | 3V3 | SCL | GND | SDA | CS | TX1 | RX1 | D- | D+ | V_USB